# Altium PCB GPSBarometer.PcbDoc
Units mm, origin at the board's own origin, x right, y up, seen from the top; angles counter-clockwise.
Board outline 82.66 x 56.61 mm, 2 copper layers (Top Layer, Bottom Layer); 57 components, 65 nets, 211 pads, 69 vias.
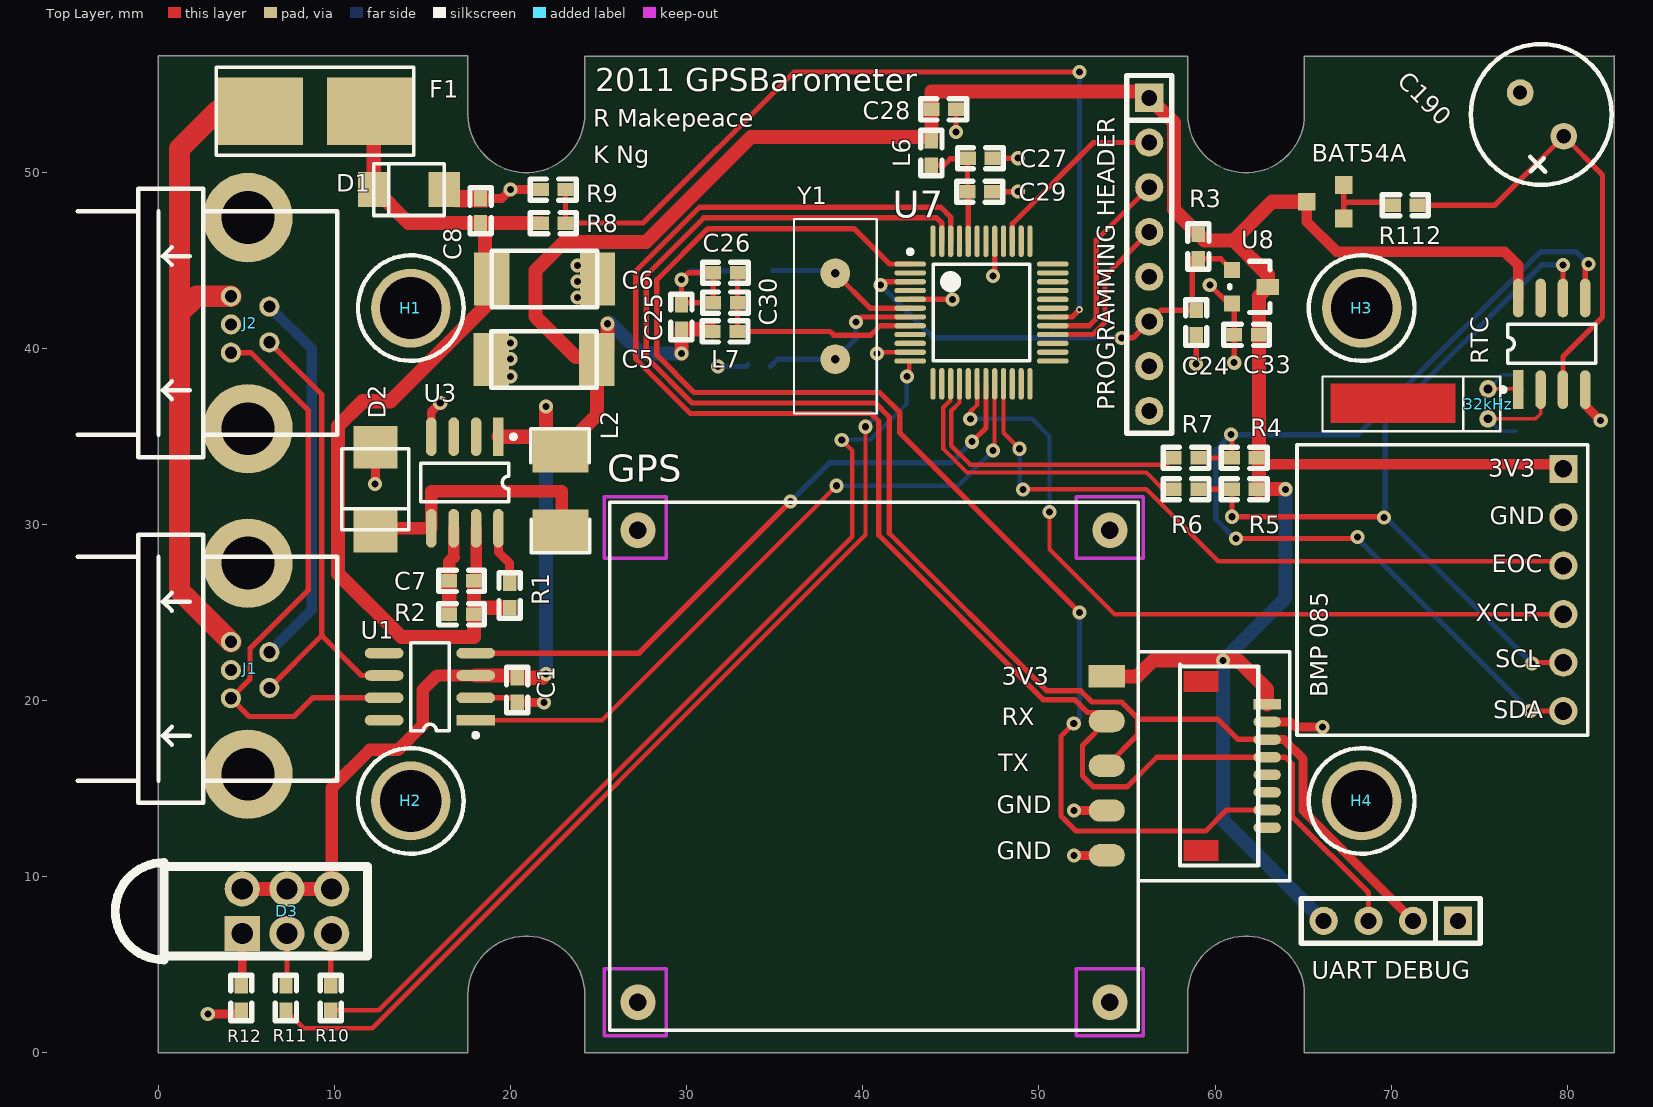
[diagram p0: Top Layer view]
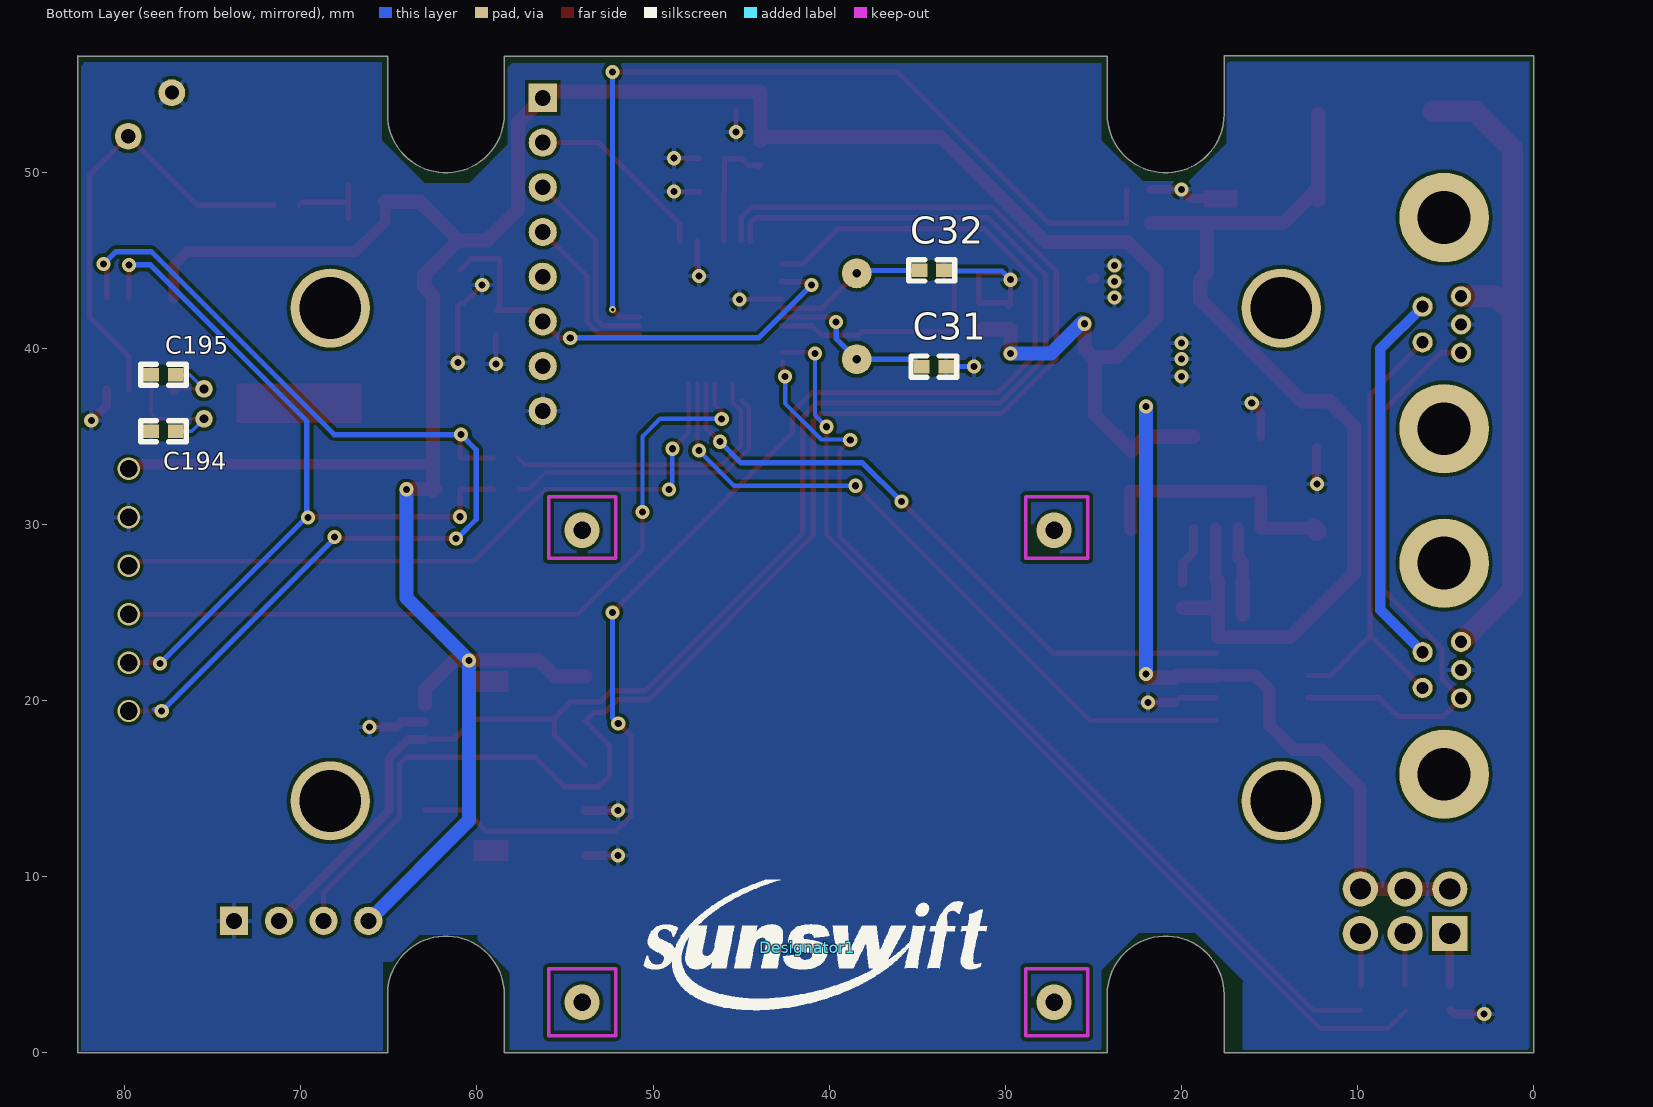
[diagram p1: Bottom Layer view, seen from below]

## Layer stack, top to bottom
Top Layer: signal copper 0.0356
Dielectric: dielectric 0.32, FR-4, Dk 4.8
Bottom Layer: signal copper 0.0356

## Board outline
17.575,0 17.575,3.31 cw(c20.89,3.31) 24.205,3.31 24.205,0 58.445,0 58.445,3.31 cw(c61.76,3.31) 65.075,3.31 65.075,0 65.08,-0.005 82.655,-0.005 82.655,56.605 82.65,56.6 65.075,56.6 65.075,53.29 cw(c61.76,53.29) 58.445,53.29 58.445,56.6 24.205,56.6 24.205,53.29 cw(c20.89,53.29) 17.575,53.29 17.575,56.605 -0.005,56.605 -0.005,-0.005 0,0

## Design rules (kind name [scope] priority, off if disabled: settings)
Clearance Clearance_1 [(HasFootprint('HMC5843 - LPCC 20 Pin') OR HasFootprint('ITG-3200 - QFN 24 Pin') OR HasFootprint('LGA - BMA180'))] p1: gap=0.2
Clearance [All] p2: gap=0.2
FabricationTestPointUsage TestPointUsage [All] p1: valid=0 allowmultiple=FALSE
FabricationTestpoint Testpoint [All] p1: side=3 testpointundercomponent=TRUE minsize=1.016 maxsize=2.54 preferedsize=1.524 minholesize=0 maxholesize=1.016 preferedholesize=0.813 testpointgrid=0.025 allowsidetop=TRUE allowsidebottom=TRUE usegrid=TRUE gridtolerance=0
HoleSize [All] p1 off: absolutevalues=TRUE maxlimit=5 minlimit=0.3 maxpercent=80.000 minpercent=20.000
MinimumSolderMaskSliver MinimumSolderMaskSliver_1 [(HasFootprint('ITG-3200 - QFN 24 Pin'))] p1: minsoldermaskwidth=0
MinimumSolderMaskSliver [All] p2: minsoldermaskwidth=0.254
PolygonConnect [All] p1: connectstyle=Relief reliefconductorwidth=0.254 reliefentries=4 polygonreliefangle="90 Angle"
RoutingVias [All] p1: holewidth=0.4 width=0.8 viastyle="Through Hole" minholewidth=0.4 minwidth=0.8 maxholewidth=0.4 maxwidth=0.8
SilkToSilkClearance [All] p1: silktosilkclearance=0.1
SilkscreenOverComponentPads [All] p1 off: minsilkscreentomaskgap=0.1
SolderMaskExpansion [All] p1: expansion=0.102
Width [All] p1: maxlimit=10 minlimit=0.2 preferedwidth=0.254 minimp=50.000000 maximp=50.000000 favimp=50.000000
22 further rules are at their usual default settings.

## Classes and differential pairs
component class GPSBarometer: 32kHz Barometer "Barometer BMP085" "Barometer BMP 085" BAT54A "BMP 085" C190 C194 C195 GPS R112 RTC
component class LPC: C24 C25 C26 C27 C28 C29 C30 C31 C32 C33 J3 L6 L7 "PROGRAMMING HEADER" R3 U7 U8 Y1
component class PWR: C1 C2 C3 C4 D1 F1 J1 J2 L1 U1 U2
component class TopLevel: D3 H1 H2 H3 H4 J4 J5 J6 R4 R5 R6 R7 R8 R9 R10 R11 R12 R21 "UART DEBUG"
component class U_3V-Switcher-50mA: C5 C6 C7 C8 D2 L2 R1 R2 U3

## Components (designator, comment, footprint, x,y, rotation, side; value= is the part's Value field where it differs from the comment)
32kHz "XTAL2" WATCHA 75.5,36 r90 top
BAT54A "BAT54A" SOT23_2 67.31,49.276 r270 top
"BMP 085" "Component_1" PCBComponent_1 81.153,18.034 r90 top (schematic designator "Barometer BMP 085")
C1 "100nF" 0603 20.366,19.901 r90 top
C5 "4u7 35V" MCCT-CASEC 24.892,39.37 r180 top
C6 "4u7 35V" MCCT-CASEC 18.923,43.942 r0 top
C7 "1n" 0603 17.907,26.797 r180 top
C8 "100nF" 0603 18.288,47.117 r90 top
C24 "10nF" 0603 58.928,42.164 r270 top
C25 "1u" 0603 29.7,42.485 r270 top
C26 "10n" 0603 31.5,44.3 r0 top
C27 "10n" 0603 45.974,50.8 r0 top
C28 "1u" 0603 43.893,53.572 r0 top
C29 "100nF" 0603 45.937,48.895 r0 top
C30 "100nF" 0603 31.5,42.6 r0 top
C31 "18pF" 0603 34.749,38.967 r180 bottom
C32 "18pF" 0603 34.876,44.428 r180 bottom
C33 "100nF" 0603 62.484,40.767 r180 top
C190 "Cap Pol2" SUPERCAP 79.802,52.046 r135 top
C194 "Cap" 0603 78.5,35.3 r180 bottom
C195 "Cap" 0603 78.5,38.5 r180 bottom
D1 "12V Transient Suppressor" SMA 14.224,49.022 r180 top
D2 "MBRS130" SMB 12.319,32.004 r270 top
D3 "1882-2781" LED_TRILEVEL 4.755,6.77 r90 top
Designator1 "Comment" SUNSWIFTLOGO 41.2,6 r180 bottom
F1 "125mA/3A" LITTELFUSE-154 8.89,53.467 r0 top
GPS "GPS" GPS 55.626,1.27 r90 top
H1 "HOLE" M2.5 14.326,42.291 r0 top
H2 "HOLE" M2.5 14.326,14.3 r0 top
H3 "HOLE" M2.5 68.326,42.291 r0 top
H4 "HOLE" M2.5 68.326,14.3 r0 top
J1 "CON5-S" TRIAD5F 6.3,22.75 r90 top
J2 "CON5-S" TRIAD5F 6.3,42.375 r90 top
L2 "330uH" 1812 22.833,29.658 r90 top
L6 "Ferrite" 0603 43.893,50.397 r90 top
L7 "Ferrite" 0603 31.478,40.961 r0 top
"PROGRAMMING HEADER" "LPC SWD Connector" IDC8 56.261,54.229 r270 top (schematic designator J3)
R1 "100k" 0603 19.939,26.67 r270 top
R2 "1R2" 0603 17.907,24.892 r180 top
R3 "10k" 0603 59.055,45.085 r90 top
R4 "4K7" 0603 60.96,33.782 r0 top
R5 "4K7" 0603 60.96,32.004 r0 top
R6 "0R" 0603 57.658,32.004 r0 top
R7 "0R" 0603 57.658,33.782 r0 top
R8 "100K" 0603 23.114,47.117 r180 top
R9 "20K" 0603 21.717,49.022 r0 top
R10 "1K" 0603 9.779,3.81 r270 top
R11 "1K" 0603 7.239,3.81 r270 top
R12 "1K" 0603 4.699,3.81 r270 top
R112 "2k" 0603 71.501,48.133 r180 top
RTC "Component_1" SO8 79.121,40.259 r0 top (schematic designator MCP79410-I/SN-ND)
U1 "SN65HVD232" SO8 15.413,20.79 r90 top
U3 "LTC1474" SO8 17.399,32.385 r180 top
U7 "LPC11C14" TSQFP50P900X900-48N 46.736,42.037 r0 top
U8 "XC61CN2002MR" SOT23(3) 60.96,44.45 r270 top
"UART DEBUG" "UART_Header" IDC4 73.787,7.493 r180 top (schematic designator J6)
Y1 "12 MHz" HC49/4H 38.432,47.349 r270 top

## Footprints (in the part's own frame and the unit in brackets; to place one, negate y for a bottom-side part, rotate by r counter-clockwise, add the part's x,y. Pads: shape width x height; smd on the part's side, far side on the other; paste and mask are expansions set on the pad)
0603 [mil]
  rect 35.43x30 smd: 1(0,0) 2(55,0)
  silkscreen extent -24,-24 79,24
1812 [mm]
  rect 2.4x3.2 smd: 1(0,0) 2(4.5,0)
  silkscreen extent -1.27,-1.66 5.77,1.7
GPS [mm]
  rect 0.6x1.55 smd: 3V3(18.515,-7.333)
  rect 1.27x2.05 smd: 3V3(20.105,1.777)
  oval 0.6x1.55 smd: BAT(11.515,-7.333) GND(17.515,-7.333) PPS(12.515,-7.333) RX(15.515,-7.333) RX2(13.515,-7.333) TX(16.515,-7.333) TX2(14.515,-7.333)
  oval 1.27x2.05 smd: GND(9.945,1.777) GND(12.485,1.777) RX(17.565,1.777) TX(15.025,1.777)
  Top Layer region: 20.415,-2.583 19.215,-2.583 19.215,-4.583 20.415,-4.583
  Top Layer region: 10.815,-2.583 9.615,-2.583 9.615,-4.583 10.815,-4.583
  Keep-Out Layer lines w0.2: -0.3,30.3 -0.3,26.8 3.5,26.8 3.5,30.3 -0.3,30.3 ; 26.8,30.3 26.8,26.8 30.3,26.8 30.3,30.3 26.8,30.3 ; -0.3,3.5 3.5,3.5 3.5,-0.3 -0.3,-0.3 -0.3,3.5 ; 26.8,3.5 26.8,-0.3 30.3,-0.3 30.3,3.5 26.8,3.5
  silkscreen extent 0,-8.6 30,30
HC49/4H [mm]
  round 1.7 hole 0.5: 1(3.085,0) 2(7.965,0)
  silkscreen extent 0,-2.35 11.05,2.35
IDC4 [mm]
  rect 1.6x1.6 hole 0.9: 1(0,0)
  round 1.6 hole 0.9: 2(2.54,0) 3(5.08,0) 4(7.62,0)
  silkscreen extent -1.27,-1.27 8.89,1.27
IDC8 [mm]
  rect 1.6x1.6 hole 0.9: 1(0,0)
  round 1.6 hole 0.9: 2(2.54,0) 3(5.08,0) 4(7.62,0) 5(10.16,0) 6(12.7,0) 7(15.24,0) 8(17.78,0)
  silkscreen extent -1.27,-1.27 19.05,1.27
LED_TRILEVEL [mm]
  rect 2x2 hole 1.2: 1(0,0)
  round 2 hole 1.2: 2(0,-2.54) 3(0,-5.08) 4(2.54,-5.08) 5(2.54,-2.54) 6(2.54,0)
  silkscreen extent -1.49,-7.11 4.03,7.21
LITTELFUSE-154 [mm]
  rect 5x3.81 smd: 1(-3.185,0) 2(3.185,0)
  silkscreen extent -5.6,-2.51 5.6,2.5
M2.5 [mm]
  round 4.5 hole 3.5: 1(0,0)
  silkscreen extent -3,-3 3,3
MCCT-CASEC [mm]
  rect 2x3 smd: 1(0,0) 2(6,0)
  silkscreen extent 0,-1.6 6,1.6
PCBComponent_1 [mm]
  rect 1.6x1.6 smd: 3V3(15.125,1.375)
  round 1.6 smd: EOC(9.625,1.375) GND(12.375,1.375) SCL(4.125,1.375) SDA(1.375,1.375) XCLR(6.875,1.375)
  silkscreen extent 0,0 16.5,16.5
SMA [mm]
  rect 1.8x2 smd paste+0: A(-2,0)
  rect 1.8x2 smd: K(2,0)
  silkscreen extent -2,-1.48 2,1.48
SMB [mm]
  rect 2.4x2.5 smd: A(-2.385,0) K(2.385,0)
  silkscreen extent -2.28,-1.9 2.3,1.9
SO8 [mm]
  rect 0.6x2.2 smd: 1(-1.905,-2.6)
  oval 0.6x2.2 smd: 2(-0.635,-2.6) 3(0.635,-2.6) 4(1.905,-2.6) 5(1.905,2.6) 6(0.635,2.6) 7(-0.635,2.6) 8(-1.905,2.6)
  silkscreen extent -2.88,-2.72 2.5,1.1
SOT23(3) [mil]
  rect 36x36 smd: 1(0,0) 2(75,0)
  rect 36x50 smd: 3(38,80)
  silkscreen extent -20,-5 95,85
SOT23_2 [mm]
  rect 1x1 smd: 1(1.9,0) 2(0,0) 3(0.95,-2.1)
SUNSWIFTLOGO [mm] "Sunswift Logo"
  silkscreen extent -9.32,-3.58 10.19,3.81
SUPERCAP [mil]
  round 60 hole 31.5: 1(0,0) 2(137.8,0)
  silkscreen extent -87,-156 228,159
TRIAD5F [mil]
  round 200 hole 118.11: 0(-273,48) 0(199,48)
  round 45 hole 27.56: 1(0,0) 2(23,86) 3(-40,86) 4(-103,86) 5(-80,0)
  silkscreen extent -337,-152 263,428
TSQFP50P900X900-48N [mm]
  oval 1.8x0.3 smd: 1(-4.05,2.75) 2(-4.05,2.25) 3(-4.05,1.75) 4(-4.05,1.25) 5(-4.05,0.75) 6(-4.05,0.25) 7(-4.05,-0.25) 8(-4.05,-0.75) 9(-4.05,-1.25) 10(-4.05,-1.75) 11(-4.05,-2.25) 12(-4.05,-2.75) 25(4.05,-2.75) 26(4.05,-2.25) 27(4.05,-1.75) 28(4.05,-1.25) 29(4.05,-0.75) 30(4.05,-0.25) 31(4.05,0.25) 32(4.05,0.75) 33(4.05,1.25) 34(4.05,1.75) 35(4.05,2.25) 36(4.05,2.75)
  oval 0.3x1.8 smd: 13(-2.75,-4.05) 14(-2.25,-4.05) 15(-1.75,-4.05) 16(-1.25,-4.05) 17(-0.75,-4.05) 18(-0.25,-4.05) 19(0.25,-4.05) 20(0.75,-4.05) 21(1.25,-4.05) 22(1.75,-4.05) 23(2.25,-4.05) 24(2.75,-4.05) 37(2.75,4.05) 38(2.25,4.05) 39(1.75,4.05) 40(1.25,4.05) 41(0.75,4.05) 42(0.25,4.05) 43(-0.25,4.05) 44(-0.75,4.05) 45(-1.25,4.05) 46(-1.75,4.05) 47(-2.25,4.05) 48(-2.75,4.05)
  silkscreen extent -4.17,-2.75 2.75,3.57, body extent -3.5,-3.5 3.5,3.5, height 1.6
WATCHA [mm]
  round 1 hole 0.5: 1(0,0) 2(1.7,0)
  Top Layer region: -0.25,1.85 2,1.85 2,8.95 -0.25,8.95
  silkscreen extent -0.7,-0.7 2.4,9.4

## Part data
32kHz: library part XTAL, "Crystal Oscillator"
C1 C7 C8 C24 C25 C26 C27 C28 C29 C30 C31 C32 C33: library part CAP, "Capacitor"
C5 C6: library part "Cap Pol3", "Polarized Capacitor (Surface Mount)"
C190: "Polarized Capacitor (Axial)"
C194 C195: "Capacitor"
D1: library part DIODE, "Diode"
D2: library part "D SCHOTTKY", "Schottky Diode"
D3: library part LED-TRILEVEL, "Three level LED"
F1: library part FUSE2, "Fuse"
H1 H2 H3 H4: "Hole"
J1 J2: "Connector, 2 pin, with shield @ S"
L2: library part Inductor, "Inductor"
L6 L7: library part INDUCTOR, "Inductor"
"PROGRAMMING HEADER": library part LPCLink_Connector
R1 R2 R3 R4 R5 R6 R7 R8 R9 R10 R11 R12 R112: library part RES1, "Resistor"
RTC: "MCP79410-I/SN-ND"
U1: "3.3V CAN Transciever"
U3: "Step-down converter"
U7: library part LPC11C14_Full
U8: library part XC61F, "SOT23 reset generator"
Y1: library part CRYSTAL, "Crystal"

## Via types
v1: diameter 0.8, hole 0.4, Top Layer to Bottom Layer, 45 vias
v2: diameter 0.8, hole 0.4, Top Layer to Bottom Layer, tented both sides, 12 vias
v3: diameter 1.27, hole 1, Top Layer to Bottom Layer, 6 vias
v4: diameter 2, hole 1, Top Layer to Bottom Layer, 4 vias
v5: diameter 0.8, hole 0.4, Top Layer to Bottom Layer, tented top, 1 vias
v6: diameter 0.4, hole 0.2, Top Layer to Bottom Layer, 1 vias

## Nets (pads, with @x,y where several pads share a name; then routed paths per layer and width w, separated by ;. In a path a pad name is that pad's centre, name@x,y a point inside that pad or via, vN(x,y) a via of type N, cw(c..) or ccw(c..) an arc to the next point about the centre after c; other vN are vias at no path point)
3V3: "BMP 085.3V3" "PROGRAMMING HEADER.1" "UART DEBUG.4" BAT54A.3 C1.2 C5.1 C25.2 C28.1 C33.1 D3.4 D3.5 D3.6 GPS.3V3 L2.2 L6.2 L7.1 R3.2 R4.2 R5.2 RTC.8 U1.3 U3.1 U8.3 | length 217.9
  Top Layer w0.6: R4.2@62.497,33.413 v3@79.778,33.413 ; BAT54A.3 65.2,48.316 65.2,47.2 66.9,45.5 76.432,45.5 77.216,44.716 RTC.8
  Top Layer w0.7: D3.4 9.835,15.035 12,17.2 13.6,17.2 15,18.6 15,20.6 15.825,21.425 U1.3
  Top Layer w0.8: D3.6 D3.5 D3.4 ; U1.3 20.239,21.425 C1.2 21.798,21.298 v2(22,21.5) ; U3.1 22.006,34.985 L2.2 24.892,36.217 C5.1 ; L2.2@22,34.991 v2(22,36.7) ; v1(25.5,41.4) 25.5,39.978 C5.1 ; v1(29.7,39.7) C25.2 31.351,41.088 L7.1 ; GPS.3V3@53.849,21.375 55.575,21.375 56.485,22.285 v1(60.457,22.285) 61.315,22.285 62.959,20.641 GPS.3V3@62.959,19.785 ; R5.2 R5.2@62.484,32.004 ; R5.2@62.484,31.9 R5.2@62.484,32.004 ; v1(64,32) 63.996,32.004 R5.2@62.484,32.004 ; BAT54A.3 63.229,48.326 61.038,46.135 ; C5.1 24.762,39.5 23.7,39.5 21.4,41.8 21.4,44.414 23.028,46.042 27.684,46.042 33.642,52 43.687,52 L6.2 C28.1 43.893,54.593 55.897,54.593 56.261,54.229 57.661,52.829 57.661,47.876 R3.2 59.402,46.135 61.038,46.135 ; 61.038,46.135 62.992,44.181 U8.3 62.484,42.977 C33.1 R5.2@62.484,32.004
  Bottom Layer w0.8: v2(22,21.5) v2(22,36.7) ; v1@25.637,41.463 27.4,39.7 v1(29.7,39.7) ; v1(64,32) 64,25.828 v1(60.457,22.285) 60.457,13.203 66.167,7.493
  other v3: 79.778,33.159
12V_MEASURE: R8.1 R9.2 U7.30 | length 49.8
  Top Layer w0.3: R9.2 R8.1 27.517,47.117 36.1,55.7 v1(52.3,55.7) ; U7.30 51.887,41.787 v6(52.3,42.2)
  Bottom Layer w0.3: v6(52.3,42.2) v1(52.3,55.7)
/RESET: "PROGRAMMING HEADER.6" C24.1 R3.1 U7.3 U8.1 | length 27.1
  Top Layer w0.3: v1(41,43.6) 41.187,43.787 U7.3 ; v2(54.7,40.6) 55.332,40.6 56.261,41.529 56.896,42.164 C24.1 58.7,42.392 58.7,45.085 60.325,45.085 U8.1
  Bottom Layer w0.3: v1(41,43.6) 44,40.6 v2(54.7,40.6)
CAN+5V: J1.1 J2.1 | length 21.6
  Bottom Layer w0.6: J1.1 8.7,25.15 8.7,39.975 J2.1
CAN+12V: C6.1 C7.1 C8.1 D1.K F1.2 R1.2 R2.1 R8.2 U3.7 | length 57.5
  Top Layer w0.65: C7.1@18.034,26.924 U3.7
  Top Layer w0.8: D1.K@12.224,48.387 D1.K D1.K@12.224,49.1 ; F1.2@12.224,53.318 D1.K@12.224,49.1 ; C7.1@18.034,26.924 C7.1 R2.1 ; R1.2 18.288,25.273 R2.1 ; R8.2 C8.1@18.542,47.117 ; D1.K@12.224,49.1 14.207,47.117 C8.1@18.542,47.117 ; R2.1 17.907,23.607 13.793,23.607 10.2,27.2 10.2,35.6 11.6,37 13.173,37 18.923,42.75 C6.1 18.542,44.323 C8.1@18.542,47.117
CAN_H: J1.4 J2.4 U1.7 | length 33.5
  Top Layer w0.3: J2.4 5.241,39.759 8.5,36.5 8.5,26.253 5.2,22.953 5.2,21.218 J1.4 5.149,19.1 7.7,19.1 8.755,20.155 U1.7
CAN_L: J1.5 J2.5 U1.6 | length 26.6
  Top Layer w0.3: J1.5 9.271,23.689 ; J2.5 9.271,37.372 9.271,23.689 ; U1.6 11.535,21.425 9.271,23.689
CANGND: "BMP 085.GND" "PROGRAMMING HEADER.8" "UART DEBUG.1" C1.1 C5.2 C6.2 C8.2 C24.2 C25.1 C26.1 C27.2 C28.2 C29.2 C30.1 C31.2 C32.2 C33.2 C190.2 C194.1 C195.1 D1.A D2.A GPS.GND J1.3 J2.3 R9.1 R12.2 RTC.4 U1.2 U3.4 U7.5 U7.41 U8.2 | length 52.2
  Top Layer w0.3: U1.2 20.112,20.155 C1.1 ; C25.1@29.827,42.358 C25.1 ; U7.5 v1@45.072,42.787 ; v1@45.29,52.3 C28.2 ; C29.2 v2@48.595,48.895 ; C27.2 v2(48.8,50.8) ; v1@47.486,44.186 U7.41 ; 55.81,36.9 56.261,36.449 ; v2(58.928,39.116) C24.2 ; v1(59.7,43.6) 60.755,42.545 U8.2 ; v2(61.087,39.187) C33.2 U8.2@61.087,42.418 ; C25.1 29.815,42.6 C30.1 C26.1 30.1,44.3 v1(29.7,43.9) C25.1
  Top Layer w0.5: v1(2.8,2.2) 4.486,2.2 R12.2 ; J1.3@3.994,21.7 4.116,21.578 J1.3 ; v1@12.3,32.5 12.319,32.519 D2.A ; U3.4 15.494,36.394 v2(16,36.9) ; C8.2@18.3,48.526 C8.2 19.492,48.514 v1(20,49.022) R9.1 ; C1.1 20.367,19.9 v2(21.9,19.9) ; C6.2@24.865,44 C6.2 C6.2@25.142,43.942 ; v1@45.072,42.787 v1(45.094,42.765) ; v1(47.4,44.1) v1@47.486,44.186 ; v1(52,11.2) 53.834,11.2 GPS.GND@53.849,11.215 ; v1(52,13.755) GPS.GND@53.849,13.755 ; GPS.GND@62.959,18.785 64.285,18.785 64.571,18.5 v1(66.1,18.5) ; RTC.4 81.026,36.774 v1(81.9,35.9)
  Bottom Layer w0.3: v1(29.7,43.9) 30.2,44.4 33.451,44.4 C32.2 ; v2@31.767,38.933 v2(31.767,38.967) C31.2 C31.2@33.479,39.094
  Bottom Layer w0.5: J1.3@4.116,21.578 J1.3 ; J2.3@4.116,41.203 J2.3
  other v1: 12.3,32.3 20,38.4 20,39.4 20,40.3 23.8,42.9 23.8,43.8 23.8,44.7 45.3,52.3
  other v2: 48.8,48.9
  other v3: 79.778,30.409
I2C_SCL: "BMP 085.SCL" R5.1 R6.2 RTC.6 | length 46.7
  Top Layer w0.3: R6.2 R5.1 v1(60.96,30.44) 69.56,30.44 v1(69.6,30.4) ; v2@78.2,22.3 78.341,22.159 v3(79.778,22.159) ; v1@79.7,44.7 79.744,44.744 v1(79.756,44.744) RTC.6
  Bottom Layer w0.3: v2(78,22.1) 69.66,30.44 69.66,35.86 78.544,44.744 v1(79.756,44.744)
I2C_SDA: "BMP 085.SDA" R4.1 R7.2 RTC.5 | length 59.3
  Top Layer w0.3: R7.2 R4.1 60.96,35.04 v1(60.9,35.1) ; v1(61.2,29.2) 68,29.2 v1(68.1,29.3) ; 78.3,19.5 78.391,19.409 v3(79.778,19.409) ; RTC.5 v1@81.026,44.674
  Bottom Layer w0.3: v1@60.939,29.4 60.039,30.3 60.039,34.239 v1(60.9,35.1) 68.1,35.1 78.494,45.494 80.506,45.494 v1(81.2,44.8) ; v1@67.9,29.4 77.8,19.5 78.3,19.5
  other v2: 77.9,19.4
Net*_1: 32kHz.2 C195.2 RTC.1 | length 3.7
  Top Layer w0.2: 32kHz.2 RTC.1@77.175,37.7
  Top Layer w0.6: RTC.1@77.175,37.7 RTC.1
  Bottom Layer w0.2: 32kHz.2 76.3,38.5 C195.2
Net*_2: 32kHz.1 C194.2 RTC.2 | length 6.4
  Top Layer w0.2: 32kHz.1 78.2,36 78.486,36.286 RTC.2
  Bottom Layer w0.2: 32kHz.1 76.2,35.3 C194.2
Net*_3: C190.1 R112.1 RTC.3 | length 26.1
  Top Layer w0.3: R112.1 75.889,48.133 C190.1 82,49.848 82,41.788 79.756,39.544 RTC.3
"NetBarometer BMP 085_EOC": "BMP 085.EOC" U7.21 | length 38.8
  Top Layer w0.25: U7.21 47.986,35.214 v1(48.9,34.3) ; v1(49.1,31.995) 56.102,31.995 60.184,27.913 v3@79.778,27.913
  Bottom Layer w0.25: v1(48.9,34.3) 48.9,32.195 v1(49.1,31.995)
  other v3: 79.778,27.659
"NetBarometer BMP 085_XCLR": "BMP 085.XCLR" U7.18 | length 44.2
  Top Layer w0.25: v1(46.1,36) 46.1,36.4 46.486,36.786 U7.18 ; v1(50.6,30.7) 50.6,28.6 54.291,24.909 v3(79.778,24.909)
  Bottom Layer w0.25: v1(46.1,36) 49.6,36 50.6,35 v1(50.6,30.7)
NetBAT54A_1: BAT54A.1 BAT54A.2 R112.2 | length 4.7
  Top Layer w0.3: BAT54A.1 BAT54A.2 ; 67.41,48.3 69.937,48.3 R112.2
NetC7_2: C7.2 R2.2 U3.6 | length 5
  Top Layer w0.65: 16.764,28.144 U3.6
  Top Layer w0.7: C7.2 16.51,27.89 16.764,28.144
  Top Layer w0.8: R2.2 C7.2
NetC26_2: C26.2 C30.2 L7.2 U7.8 | length 13.5
  Top Layer w0.3: C26.2 32.875,44.278 L7.2 38.139,40.961 38.35,40.75 40.45,40.75 40.987,41.287 U7.8
NetC27_1: C27.1 C29.1 L6.1 U7.44 | length 7.1
  Top Layer w0.3: L6.1@44.008,50.282 L6.1 44.597,50.397 44.963,50.763 C27.1@45.937,50.763 ; C27.1 C27.1@45.937,50.763 ; U7.44 45.986,48.846 C29.1 C27.1@45.937,50.763
NetD2_K: D2.K L2.1 U3.5 | length 15
  Top Layer w0.7: D2.K@12.485,29.785 U3.5 15.494,31.894 22.894,31.894 22.894,29.719 L2.1
  Top Layer w1.1: D2.K D2.K@12.485,29.785
NetD3_1: D3.1 R12.1 | length 2.9
  Top Layer w0.5: R12.1@4.755,3.866 D3.1
NetD3_2: D3.2 R11.1 | length 2.9
  Top Layer w0.3: R11.1@7.295,3.866 D3.2
NetD3_3: D3.3 R10.1 | length 3
  Top Layer w0.3: R10.1 9.779,6.714 D3.3
NetF1_1: F1.1 J1.2 J2.2 | length 37.9
  Top Layer w1.2: J1.2 1.2,26.25 1.2,42 ; J2.2 2.159,42.959 1.2,42 ; F1.1 3.327,53.467 1.2,51.34 1.2,42
NetGPS_PPS: GPS.PPS U7.1 | length 76
  Top Layer w0.3: U7.1 41.513,44.787 39.5,46.8 31.2,46.8 28.3,43.9 28.3,39.614 30.414,37.5 40.958,37.5 42.1,36.358 42.1,35.2 v1(52.3,25) ; v1(51.974,18.7) 51.25,17.976 51.25,13.445 52.095,12.6 59.474,12.6 60.659,13.785 GPS.PPS
  Bottom Layer w0.3: v1(51.974,18.7) 52.3,19.026 v1(52.3,25)
NetGPS_RX: "UART DEBUG.3" GPS.RX U7.46 | length 92.4
  Top Layer w0.3: U7.46 44.986,47.463 44.434,48.015 30.718,48.015 27.1,44.397 27.1,39.4 30.2,36.3 40.461,36.3 40.9,35.861 40.9,29.393 50.239,20.054 52.026,20.054 52.759,19.32 53.364,19.32 53.849,18.835 52.474,17.46 52.474,15.726 53.1,15.1 55,15.1 56.685,16.785 62.959,16.785 63.998,16.785 64.4,16.384 64.4,13.4 68.707,9.093 68.707,7.493
NetGPS_TX: "UART DEBUG.2" GPS.TX U7.47 | length 89.7
  Top Layer w0.3: U7.47 44.486,47.114 44.185,47.415 30.966,47.415 27.7,44.149 27.7,39.507 30.307,36.9 40.709,36.9 41.5,36.109 41.5,29.5 50.446,20.554 52.374,20.554 53.008,19.92 54.689,19.92 55.6,19.009 55.6,18.046 GPS.TX@53.849,16.295 ; 55.674,18.935 60.165,18.935 61.3,17.8 GPS.TX@62.959,17.8
  Top Layer w0.5: GPS.TX@62.959,17.785 63.915,17.785 65,16.7 65,13.749 71.247,7.502 71.247,7.493
NetR1_1: R1.1 U3.8 | length 3.4
  Top Layer w0.5: U3.8 19.304,28.435 19.939,27.8 R1.1
NetR6_1: R6.1 U7.15 | length 16.9
  Top Layer w0.25: 44.962,37.038 44.575,36.651 44.575,34.288 45.913,32.951 56.1,32.951 57.047,32.004 R6.1
NetR7_1: R7.1 U7.16 | length 16.9
  Top Layer w0.25: U7.16 45.486,36.926 45.025,36.465 45.025,34.475 46.099,33.401 57.277,33.401 R7.1
NetU1_1: U1.1 U7.20 | length 39.6
  Top Layer w0.25: U1.1 25.185,18.885 v1(38.5,32.2) ; v1(47.4,34.2) 47.475,34.275 47.475,37.976 U7.20
  Bottom Layer w0.25: v1(38.5,32.2) 38.889,32.2 45.4,32.2 v1(47.4,34.2)
NetU1_4: U1.4 U7.19 | length 36.9
  Top Layer w0.3: U1.4 27.295,22.695 v5(35.9,31.3) ; v1(46.2,34.7) 46.986,35.486 U7.19
  Bottom Layer w0.3: v5(35.9,31.3) 38.1,33.5 45,33.5 v1(46.2,34.7) v1@46.3,34.8
NetU7_2: U7.2
NetU7_4: U7.4
NetU7_9: U7.9
NetU7_10: U7.10
NetU7_13: U7.13
NetU7_14: U7.14
NetU7_17: U7.17
NetU7_22: U7.22
NetU7_23: U7.23
NetU7_24: U7.24
NetU7_25: U7.25
NetU7_26: U7.26
NetU7_27: U7.27
NetU7_31: U7.31
NetU7_32: U7.32
NetU7_33: U7.33
NetU7_34: U7.34
NetU7_35: U7.35
NetU7_36: U7.36
NetU7_37: U7.37
NetU7_38: U7.38
NetU7_40: U7.40
NetU7_42: U7.42
NetU7_43: U7.43
NetU7_45: U7.45
NetU7_48: U7.48
REDLED: R10.2 U7.12 | length 53.5
  Top Layer w0.25: R10.2 12.513,2.413 39.4,29.3 39.4,34.2 v1(38.8,34.8) ; v1(42.5,38.4) 42.637,38.537 U7.12@42.637,39.265
  Bottom Layer w0.25: v1@38.8,34.825 40.45,34.825 42.5,36.875 v1(42.5,38.4)
TCLK: "PROGRAMMING HEADER.3" U7.29 | length 11.3
  Top Layer w0.3: U7.29 52.848,41.287 53.25,41.689 53.25,46.138 56.261,49.149
TDO: "PROGRAMMING HEADER.4" U7.28 | length 9.4
  Top Layer w0.3: U7.28 53.055,40.787 53.75,41.482 53.75,44.098 56.261,46.609
TMS: "PROGRAMMING HEADER.2" U7.39 | length 10.7
  Top Layer w0.3: U7.39 48.486,47.071 53.104,51.689 56.261,51.689
XTALIN: C32.1 U7.6 Y1.1 | length 8.7
  Top Layer w0.3: Y1.1 40.409,42.287 U7.6
  Bottom Layer w0.3: C32.1 38.268,44.428 Y1.1
XTALOUT: C31.1 U7.7 Y1.2 | length 9.7
  Top Layer w0.3: v1(39.6,41.5) 39.887,41.787 U7.7
  Bottom Layer w0.3: C31.1 35.166,39.384 Y1.2 39.6,40.552 v1(39.6,41.5)
YELLED: R11.2 U7.11 | length 57.7
  Top Layer w0.25: R11.2 8.252,1.4 12.136,1.4 40.15,29.414 v1(40.15,35.55) v1@40.3,35.7 ; v1@40.84,39.74 v1(40.8,39.7) 40.887,39.787 U7.11
  Bottom Layer w0.25: v1(40.15,35.55) 40.8,36.2 v1(40.8,39.7)
pads on no net: "PROGRAMMING HEADER.5" "PROGRAMMING HEADER.7" GPS.BAT GPS.RX2 GPS.TX2 H1.1 H2.1 H3.1 H4.1 J1.0 J2.0 RTC.7 U1.5 U1.8 U3.2 U3.3
copper on no net:
  other v4: 27.226,2.87 54.026,2.87 27.226,29.67 54.026,29.67

## Polygon pours and split planes (outlines as drawn)
CANGND on Bottom Layer "GNDPLANE" (solid, pour order 1000): 0.254,56.286 17.272,56.286 17.323,56.236 17.424,56.134 17.424,51.664 17.424,51.638 19.253,49.809 19.583,49.479 22.149,49.479 22.2,49.479 24.486,51.765 24.536,51.816 24.536,56.185 57.988,56.185 58.242,55.931 58.242,51.968 58.242,51.587 60.3,49.53 60.452,49.378 62.967,49.378 65.354,51.765 65.405,51.816 65.405,56.236 82.271,56.236 82.474,56.032 82.474,0.127 65.303,0.127 65.354,0.178 65.354,5.156 64.821,5.156 63.271,6.706 59.944,6.706 59.944,6.401 58.242,4.699 58.141,4.597 58.141,0.178 24.435,0.178 24.536,0.279 24.536,3.759 24.536,4.699 22.479,6.756 22.428,6.807 19.355,6.807 19.202,6.807 16.459,4.064 16.51,4.013 16.51,0.178 0.356,0.178 0.203,0.33 0.254,0.381 0.254,56.286

## Keep-outs
Mechanical 1:
  lines w0.254: 58.445,53.29 58.445,56.6

## Other copper
Top Layer:
  rectangle net CANGND: 16.8,48 18.7,49

## Silkscreen, mask and mechanical layers (free items; w line width, h text height)
Top Overlay:
  text "2011 GPSBarometer" at 24.8,54.6 h1.3
  text "R Makepeace" at 24.7,52.6 h1
  text "K Ng" at 24.7,50.5 h1
  text "3V3" at 75.5,32.7 h1
  text "GND" at 75.6,30 h1
  text "EOC" at 75.7,27.3 h1
  text "XCLR" at 74.8,24.5 h1
  text "SCL" at 75.9,21.9 h1
  text "3V3" at 47.9,20.9 h1
  text "SDA" at 75.8,19 h1
  text "RX" at 47.9,18.6 h1
  text "TX" at 47.7,16 h1
  text "GND" at 47.6,13.6 h1
  text "GND" at 47.6,11 h1
Top Solder:
  rectangle: 58.2,20.5 60.2,21.7
  rectangle: 58.2,10.9 60.2,12.1
Mechanical 1:
  circle w0.254: c68.325,14.3 r1.602
  circle w0.254: c14.325,42.3 r1.602
  lines w0.254: -0.005,-0.005 -0.005,56.605 17.575,56.605 17.575,53.295 ; 0,0 17.575,0 ; 17.575,53.29 ccw(c20.89,53.29) 24.205,53.29 24.205,56.6 58.445,56.6 ; 17.6,0 17.6,3.31 cw(c20.915,3.31) 24.23,3.31 ; 24.205,0 58.445,0 ; 24.23,-0.005 24.23,3.305 ; 58.445,53.29 ccw(c61.76,53.29) 65.075,53.29 65.075,56.6 82.65,56.6 ; 58.5,0 58.5,3.31 cw(c61.815,3.31) 65.13,3.31 ; 65.08,-0.005 82.655,-0.005 82.655,56.605 ; 65.13,-0.005 65.13,3.305
  text "Hole = 3.5mm" at 12.167,63.754 h1
  text "Press q to toggle mil and mm" at -48.621,51.201 h1
  text "CAN_2 Placement" at -25.005,43.048 h1
  text "X 6.300mm" at -25.005,40.457 h1
  text "Y 42.375mm" at -25.005,37.79 h1
  text "CAN_1 Placement" at -25.005,23.338 h1
  text "X 6.300mm" at -25.005,20.747 h1
  text "Y 22.750mm" at -25.005,18.08 h1
  text "LED Placement" at -25.005,9.52 h1
  text "X 4.755mm" at -25.005,6.929 h1
  text "Y 6.770mm" at -25.005,4.262 h1